# EAGLE board JTAG Passthrough (EAGLE 6.5.0)
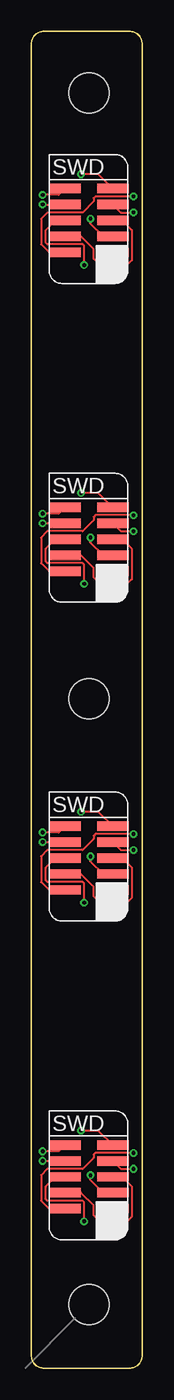
[diagram p0: board, top side]
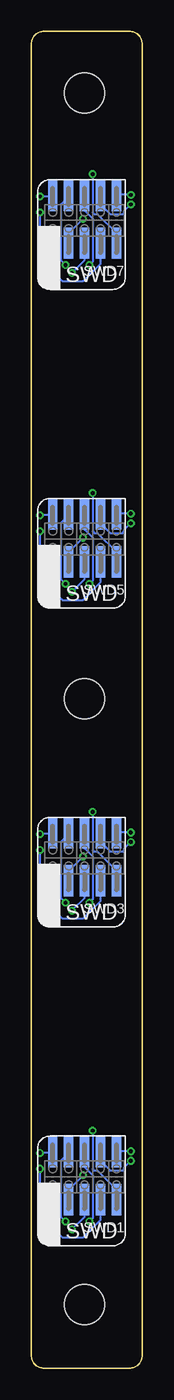
[diagram p1: board, bottom side, seen from below]

Size 8.82 x 106.5 mm. Coordinates in mm from the lower left corner, seen from the top.
Copper layers (1*16): Top 0.035mm / dielectric 1.5mm / Bottom 0.035mm
Design rules "ITEADstudio_DRC": minimum track width 6mil, minimum drill 12mil, track to track 6mil, track to pad 6mil, pad to pad 6mil, via to via 6mil, smd to smd 0mil, copper to edge 10mil, drill to drill 10mil, minimum pad ring 10mil, minimum via ring 6mil, stop-mask expansion 2mil, vias tented up to drill 100mil, thermal gap 10mil
Holes 3.2 mm at 4.58,53.34 4.58,5.08 4.58,101.6

## Footprints (pad centres in the part's own frame; a part is rotated, then mirrored left to right if it is on the bottom)
M50-3600542 = smd 0.75 x 2.5: 1 -2.54,-1.81; 2 -2.54,2; 3 -1.27,-1.81; 4 -1.27,2; 5 0,-1.81; 6 0,2; 7 1.27,-1.81; 8 1.27,2; 9 2.54,-1.81; 10 2.54,2
SWD_VERTICAL_WITHHOLE = smd 0.75 x 2.5: 1 -2.54,-1.905; 2 -2.54,1.905; 3 -1.27,-1.905; 4 -1.27,1.905; 5 0,-1.905; 6 0,1.905; 7 1.27,-1.905; 8 1.27,1.905; 9 2.54,-1.905; 10 2.54,1.905

## Placement (x,y rotation side)
SWD1  CORTEX_SWD  [M50-3600542]  4.58,15.24 0 bottom
SWD2  CORTEX_SWDVERT_HOLE  [SWD_VERTICAL_WITHHOLE]  4.58,15.24 90 top
SWD3  CORTEX_SWD  [M50-3600542]  4.58,40.64 0 bottom
SWD4  CORTEX_SWDVERT_HOLE  [SWD_VERTICAL_WITHHOLE]  4.58,40.64 90 top
SWD5  CORTEX_SWD  [M50-3600542]  4.58,66.04 0 bottom
SWD6  CORTEX_SWDVERT_HOLE  [SWD_VERTICAL_WITHHOLE]  4.58,66.04 90 top
SWD7  CORTEX_SWD  [M50-3600542]  4.58,91.44 0 bottom
SWD8  CORTEX_SWDVERT_HOLE  [SWD_VERTICAL_WITHHOLE]  4.58,91.44 90 top
U$2  EURORACK_PCB2HP  [EURORACK2HPPCB]  -0.5,0 0 top

## Library data of the parts
SWD1-SWD8 = carrilib with jtags
U$2 = EurorackModularParts

## Nets
N$1: SWD1.1 SWD2.1
N$2: SWD1.2 SWD2.2
N$3: SWD1.3 SWD2.3
N$4: SWD1.4 SWD2.4
N$5: SWD1.5 SWD2.5
N$6: SWD1.6 SWD2.6
N$7: SWD1.7 SWD2.7
N$8: SWD1.8 SWD2.8
N$9: SWD1.9 SWD2.9
N$10: SWD1.10 SWD2.10
N$11: SWD3.1 SWD4.1
N$12: SWD3.2 SWD4.2
N$13: SWD3.3 SWD4.3
N$14: SWD3.4 SWD4.4
N$15: SWD3.5 SWD4.5
N$16: SWD3.6 SWD4.6
N$17: SWD3.7 SWD4.7
N$18: SWD3.8 SWD4.8
N$19: SWD3.9 SWD4.9
N$20: SWD3.10 SWD4.10
N$21: SWD5.1 SWD6.1
N$22: SWD5.2 SWD6.2
N$23: SWD5.3 SWD6.3
N$24: SWD5.4 SWD6.4
N$25: SWD5.5 SWD6.5
N$26: SWD5.6 SWD6.6
N$27: SWD5.7 SWD6.7
N$28: SWD5.8 SWD6.8
N$29: SWD5.9 SWD6.9
N$30: SWD5.10 SWD6.10
N$31: SWD7.1 SWD8.1
N$32: SWD7.2 SWD8.2
N$33: SWD7.3 SWD8.3
N$34: SWD7.4 SWD8.4
N$35: SWD7.5 SWD8.5
N$36: SWD7.6 SWD8.6
N$37: SWD7.7 SWD8.7
N$38: SWD7.8 SWD8.8
N$39: SWD7.9 SWD8.9
N$40: SWD7.10 SWD8.10

## Tracks (layer width: path | path; a pad name or v marks a point on that pad's centre or on a via)
N$1  (via drill 0.3)
  Top 0.152: SWD2.1 6.49,12.06 v6.87,11.68
  Bottom 0.152: v6.87,11.68 6.87,13.08 7.12,13.34 SWD1.1
N$2  (via drill 0.3)
  Top 0.152: SWD2.2 1.41,12.7 0.77,13.34 0.77,15.37 1.28,15.88 4.07,15.88 4.96,16.76 4.96,17.02 5.09,17.14 v8.14,17.14
  Bottom 0.152: v8.14,17.14 7.12,17.14 SWD1.2
N$3  (via drill 0.3)
  Top 0.152: v4.71,15.37 4.71,14.99 5.72,13.97 SWD2.3
  Bottom 0.152: SWD1.3 5.85,14.22 v4.71,15.37
N$4  (via drill 0.3)
  Top 0.152: SWD2.4 3.95,13.97 4.96,12.95 4.96,12.19 5.47,11.68 v6.1,11.68
  Bottom 0.152: v6.1,11.68 6.49,12.06 6.49,16.51 5.85,17.14 SWD1.4
N$5  (via drill 0.3)
  Top 0.152: v5.6,11.05 6.99,11.05 8.01,12.06 8.01,14.48 7.25,15.24 SWD2.5
  Bottom 0.152: SWD1.5 4.58,12.06 v5.6,11.05
N$6  (via drill 0.3)
  Top 0.152: SWD2.6 1.91,15.24 1.15,14.48 1.15,13.46 1.28,13.34 4.07,13.34 4.2,13.21 v4.2,11.68
  Bottom 0.152: v4.2,11.68 3.95,11.94 3.95,15.37 4.58,16 SWD1.6
N$7  (via drill 0.3)
  Top 0.152: v8.14,15.88 7.12,15.88 SWD2.7
  Bottom 0.152: SWD1.7 3.31,11.81 4.71,10.41 6.36,10.41 8.14,12.19 v8.14,15.88
N$8  (via drill 0.3)
  Top 0.152: v0.9,16.51 SWD2.8
  Bottom 0.152: v0.9,16.51 1.41,16 1.41,15.88 1.53,15.75 2.55,15.75 3.31,16.51 SWD1.8
N$9  (via drill 0.3)
  Top 0.152: v3.95,18.92 5.34,18.92 SWD2.9
  Bottom 0.152: SWD1.9 2.04,14.22 3.56,15.75 3.82,15.75 3.95,15.88 v3.95,18.92
N$10  (via drill 0.3)
  Top 0.152: v0.9,17.27 2.17,17.27 SWD2.10
  Bottom 0.152: v0.9,17.27 2.04,17.27 SWD1.10
N$11  (via drill 0.3)
  Top 0.152: SWD4.1 6.49,37.47 v6.87,37.08
  Bottom 0.152: v6.87,37.08 6.87,38.48 7.12,38.73 SWD3.1
N$12  (via drill 0.3)
  Top 0.152: SWD4.2 1.41,38.1 0.77,38.73 0.77,40.77 1.28,41.27 4.07,41.27 4.96,42.16 4.96,42.42 5.09,42.55 v8.14,42.55
  Bottom 0.152: v8.14,42.55 7.12,42.55 SWD3.2
N$13  (via drill 0.3)
  Top 0.152: v4.71,40.77 4.71,40.39 5.72,39.37 SWD4.3
  Bottom 0.152: SWD3.3 5.85,39.62 v4.71,40.77
N$14  (via drill 0.3)
  Top 0.152: SWD4.4 3.95,39.37 4.96,38.35 4.96,37.59 5.47,37.08 v6.1,37.08
  Bottom 0.152: v6.1,37.08 6.49,37.47 6.49,41.91 5.85,42.55 SWD3.4
N$15  (via drill 0.3)
  Top 0.152: v5.6,36.45 6.99,36.45 8.01,37.47 8.01,39.88 7.25,40.64 SWD4.5
  Bottom 0.152: SWD3.5 4.58,37.47 v5.6,36.45
N$16  (via drill 0.3)
  Top 0.152: SWD4.6 1.91,40.64 1.15,39.88 1.15,38.86 1.28,38.73 4.07,38.73 4.2,38.61 v4.2,37.08
  Bottom 0.152: v4.2,37.08 3.95,37.34 3.95,40.77 4.58,41.4 SWD3.6
N$17  (via drill 0.3)
  Top 0.152: v8.14,41.27 7.12,41.27 SWD4.7
  Bottom 0.152: SWD3.7 3.31,37.21 4.71,35.81 6.36,35.81 8.14,37.59 v8.14,41.27
N$18  (via drill 0.3)
  Top 0.152: v0.9,41.91 SWD4.8
  Bottom 0.152: v0.9,41.91 1.41,41.4 1.41,41.27 1.53,41.15 2.55,41.15 3.31,41.91 SWD3.8
N$19  (via drill 0.3)
  Top 0.152: v3.95,44.32 5.34,44.32 SWD4.9
  Bottom 0.152: SWD3.9 2.04,39.62 3.56,41.15 3.82,41.15 3.95,41.27 v3.95,44.32
N$20  (via drill 0.3)
  Top 0.152: v0.9,42.67 2.17,42.67 SWD4.10
  Bottom 0.152: v0.9,42.67 2.04,42.67 SWD3.10
N$21  (via drill 0.3)
  Top 0.152: SWD6.1 6.49,62.87 v6.87,62.48
  Bottom 0.152: v6.87,62.48 6.87,63.88 7.12,64.14 SWD5.1
N$22  (via drill 0.3)
  Top 0.152: SWD6.2 1.41,63.5 0.77,64.14 0.77,66.17 1.28,66.67 4.07,66.67 4.96,67.56 4.96,67.82 5.09,67.94 v8.14,67.94
  Bottom 0.152: v8.14,67.94 7.12,67.94 SWD5.2
N$23  (via drill 0.3)
  Top 0.152: v4.71,66.17 4.71,65.79 5.72,64.77 SWD6.3
  Bottom 0.152: SWD5.3 5.85,65.02 v4.71,66.17
N$24  (via drill 0.3)
  Top 0.152: SWD6.4 3.95,64.77 4.96,63.75 4.96,62.99 5.47,62.48 v6.1,62.48
  Bottom 0.152: v6.1,62.48 6.49,62.87 6.49,67.31 5.85,67.94 SWD5.4
N$25  (via drill 0.3)
  Top 0.152: v5.6,61.85 6.99,61.85 8.01,62.87 8.01,65.28 7.25,66.04 SWD6.5
  Bottom 0.152: SWD5.5 4.58,62.87 v5.6,61.85
N$26  (via drill 0.3)
  Top 0.152: SWD6.6 1.91,66.04 1.15,65.28 1.15,64.26 1.28,64.14 4.07,64.14 4.2,64.01 v4.2,62.48
  Bottom 0.152: v4.2,62.48 3.95,62.74 3.95,66.17 4.58,66.8 SWD5.6
N$27  (via drill 0.3)
  Top 0.152: v8.14,66.67 7.12,66.67 SWD6.7
  Bottom 0.152: SWD5.7 3.31,62.61 4.71,61.21 6.36,61.21 8.14,62.99 v8.14,66.67
N$28  (via drill 0.3)
  Top 0.152: v0.9,67.31 SWD6.8
  Bottom 0.152: v0.9,67.31 1.41,66.8 1.41,66.67 1.53,66.55 2.55,66.55 3.31,67.31 SWD5.8
N$29  (via drill 0.3)
  Top 0.152: v3.95,69.72 5.34,69.72 SWD6.9
  Bottom 0.152: SWD5.9 2.04,65.02 3.56,66.55 3.82,66.55 3.95,66.67 v3.95,69.72
N$30  (via drill 0.3)
  Top 0.152: v0.9,68.07 2.17,68.07 SWD6.10
  Bottom 0.152: v0.9,68.07 2.04,68.07 SWD5.10
N$31  (via drill 0.3)
  Top 0.152: SWD8.1 6.49,88.27 v6.87,87.88
  Bottom 0.152: v6.87,87.88 6.87,89.28 7.12,89.53 SWD7.1
N$32  (via drill 0.3)
  Top 0.152: SWD8.2 1.41,88.9 0.77,89.53 0.77,91.57 1.28,92.08 4.07,92.08 4.96,92.96 4.96,93.22 5.09,93.34 v8.14,93.34
  Bottom 0.152: v8.14,93.34 7.12,93.34 SWD7.2
N$33  (via drill 0.3)
  Top 0.152: v4.71,91.57 4.71,91.19 5.72,90.17 SWD8.3
  Bottom 0.152: SWD7.3 5.85,90.42 v4.71,91.57
N$34  (via drill 0.3)
  Top 0.152: SWD8.4 3.95,90.17 4.96,89.15 4.96,88.39 5.47,87.88 v6.1,87.88
  Bottom 0.152: v6.1,87.88 6.49,88.27 6.49,92.71 5.85,93.34 SWD7.4
N$35  (via drill 0.3)
  Top 0.152: v5.6,87.25 6.99,87.25 8.01,88.27 8.01,90.68 7.25,91.44 SWD8.5
  Bottom 0.152: SWD7.5 4.58,88.27 v5.6,87.25
N$36  (via drill 0.3)
  Top 0.152: SWD8.6 1.91,91.44 1.15,90.68 1.15,89.66 1.28,89.53 4.07,89.53 4.2,89.41 v4.2,87.88
  Bottom 0.152: v4.2,87.88 3.95,88.14 3.95,91.57 4.58,92.2 SWD7.6
N$37  (via drill 0.3)
  Top 0.152: v8.14,92.08 7.12,92.08 SWD8.7
  Bottom 0.152: SWD7.7 3.31,88.01 4.71,86.61 6.36,86.61 8.14,88.39 v8.14,92.08
N$38  (via drill 0.3)
  Top 0.152: v0.9,92.71 SWD8.8
  Bottom 0.152: v0.9,92.71 1.41,92.2 1.41,92.08 1.53,91.95 2.55,91.95 3.31,92.71 SWD7.8
N$39  (via drill 0.3)
  Top 0.152: v3.95,95.12 5.34,95.12 SWD8.9
  Bottom 0.152: SWD7.9 2.04,90.42 3.56,91.95 3.82,91.95 3.95,92.08 v3.95,95.12
N$40  (via drill 0.3)
  Top 0.152: v0.9,93.47 2.17,93.47 SWD8.10
  Bottom 0.152: v0.9,93.47 2.04,93.47 SWD7.10